# EAGLE board Maze_Project (EAGLE 8.7.0)
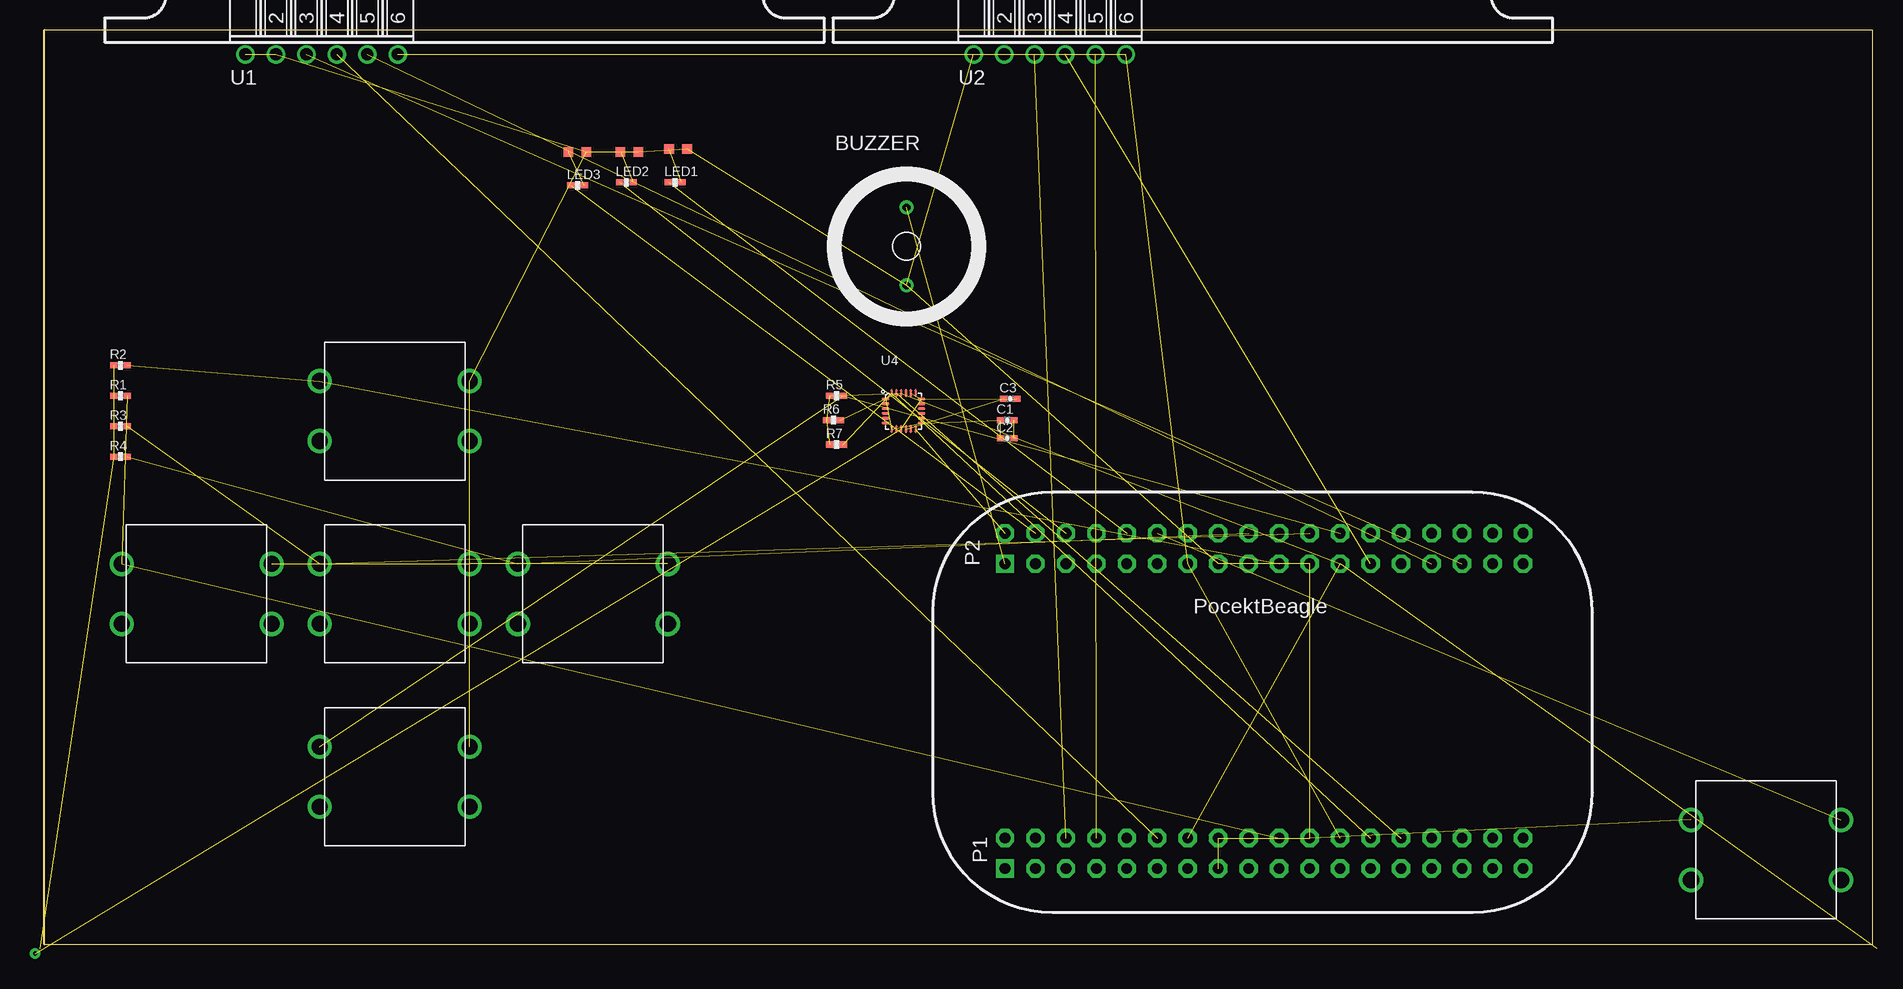
[diagram p0: board, top side]
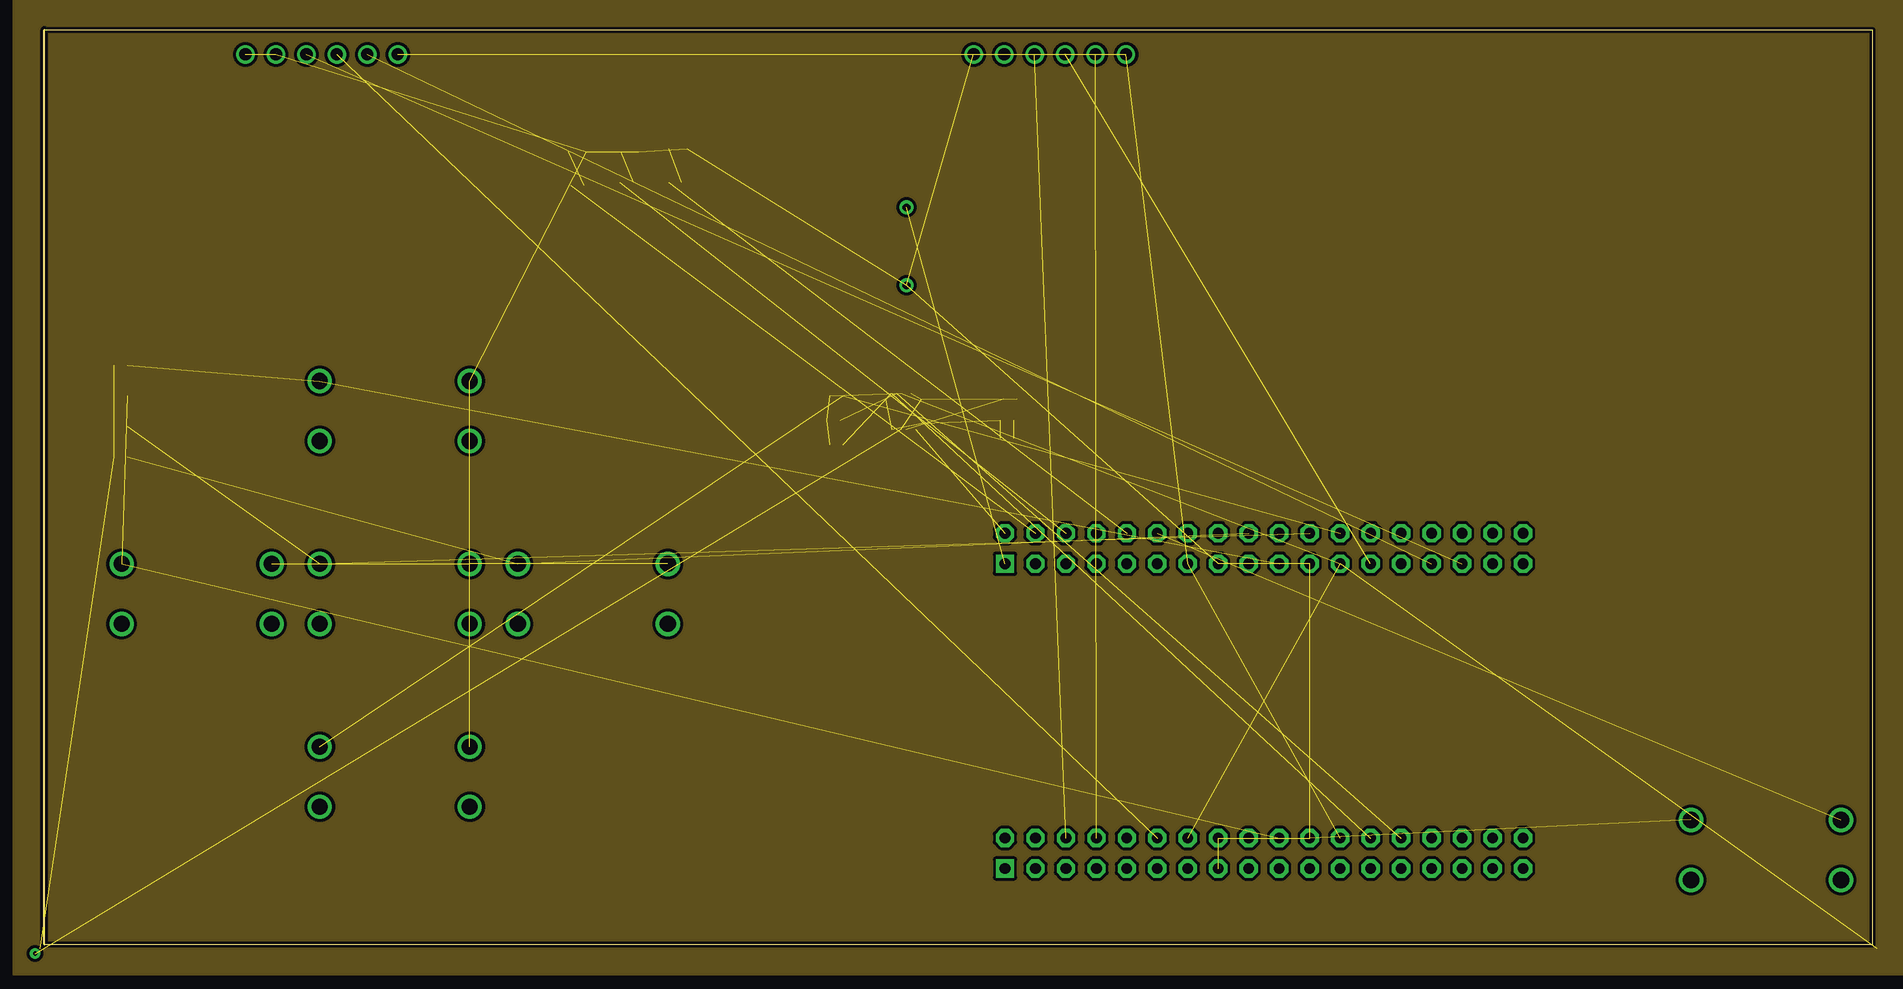
[diagram p1: board, inner layer Route2]
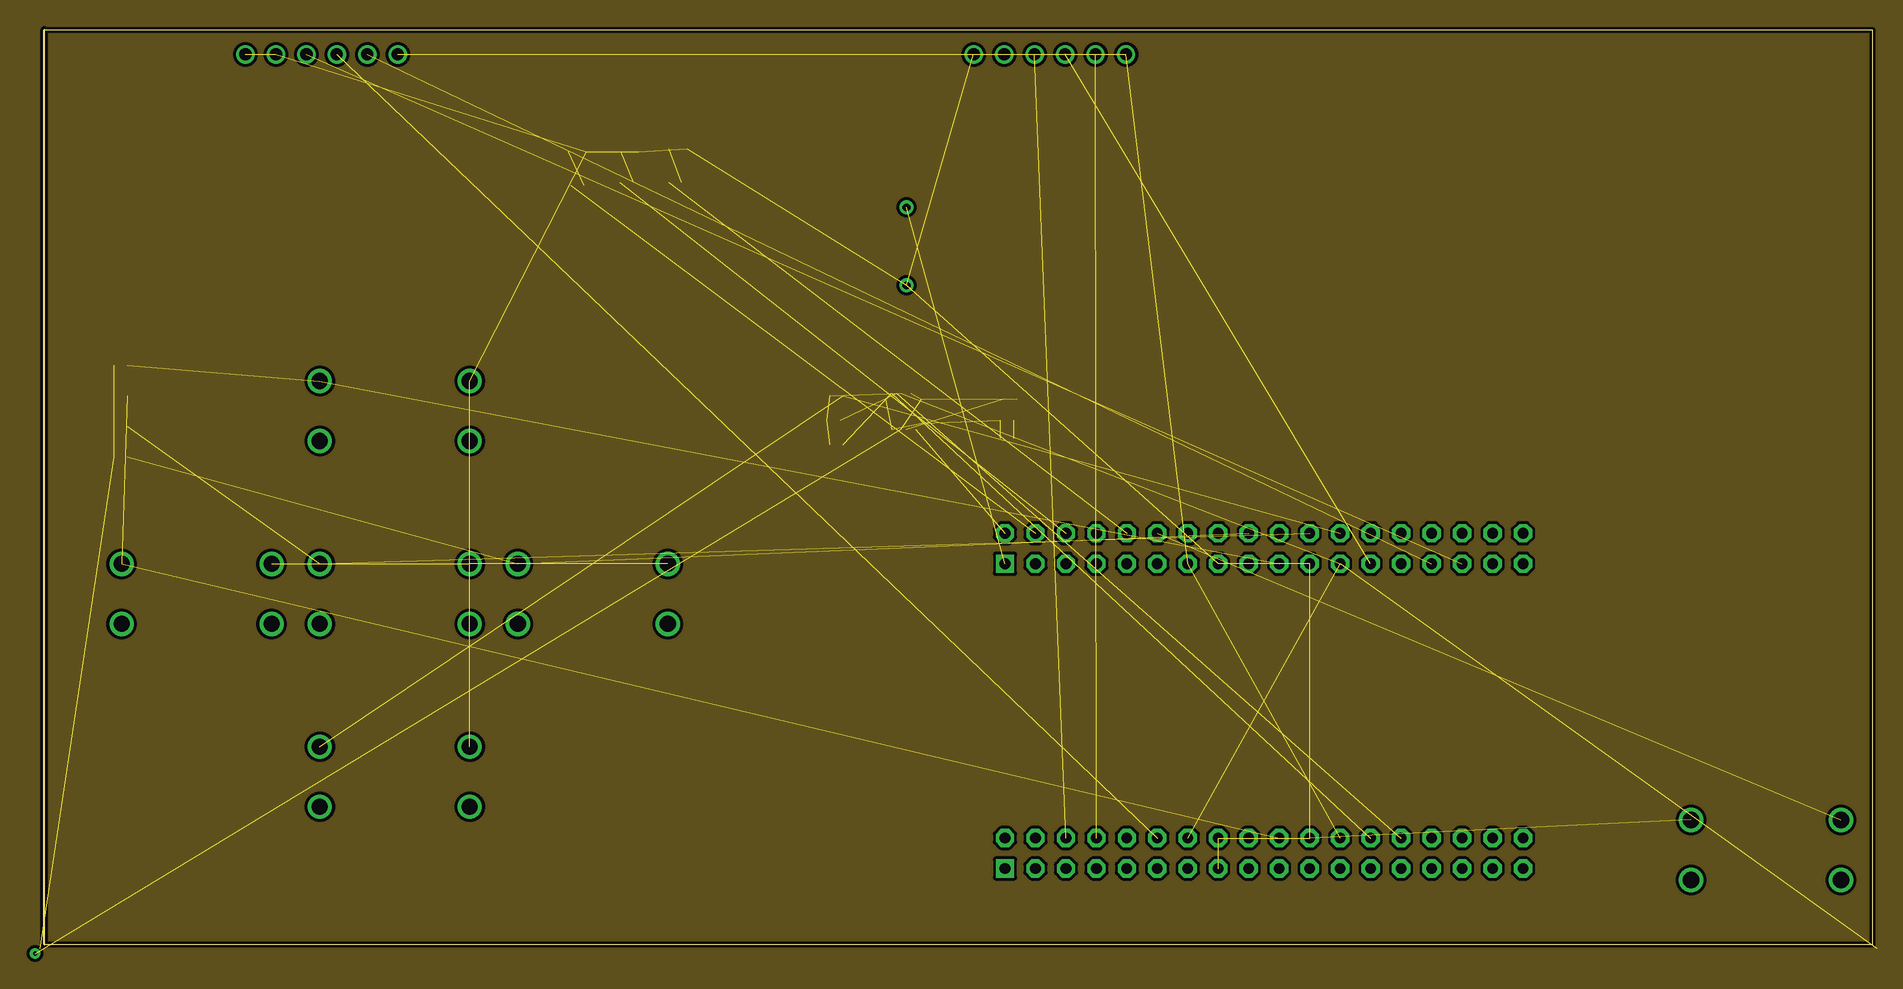
[diagram p2: board, inner layer Route15]

Size 152.4 x 76.2 mm. Coordinates in mm from the lower left corner, seen from the top.
Outline: 0,0 152.4,0 152.4,76.2 0,76.2 0,0
Copper layers (1*2*15*16): Top 0.035mm / dielectric 0.23mm / Route2 0.035mm / dielectric 0.93mm / Route15 0.035mm / dielectric 0.23mm / Bottom 0.035mm
Design rules "ENGI301_Maze_Project_4lyr (1)": minimum track width 10mil, minimum drill 12mil, track to track 10mil, track to pad 10mil, pad to pad 10mil, via to via 10mil, smd to smd 10mil, copper to edge 10mil, drill to drill 12mil, minimum pad ring 10mil, minimum via ring 10mil, stop-mask expansion 3mil, vias tented up to drill 25mil, thermal gap 10mil

## Footprints (pad centres in the part's own frame; a part is rotated, then mirrored left to right if it is on the bottom)
BUTTON = drill 1.35: P$1 -6.25,2.5; P$2 -6.25,-2.5; P$3 6.25,-2.5; P$4 6.25,2.5
BUZZER = drill 0.65: P$1 0,3.25; P$2 0,-3.25
C0402 = smd 0.61 x 0.508: 1 -0.559,0; 2 0.559,0
R0402 = smd 0.61 x 0.508: 1 -0.559,0; 2 0.559,0
FE06W = drill 1.016: 1 -6.35,0; 2 -3.81,0; 3 -1.27,0; 4 1.27,0; 5 3.81,0; 6 6.35,0
POCKETBEAGLE = drill 0.889 pad 1.524 square: 1 5.91,3.53; 37 5.91,28.93 | drill 0.889 pad 1.524 octagon: 2 5.91,6.07; 3 8.45,3.53; 4 8.45,6.07; 5 10.99,3.53; 6 10.99,6.07; 7 13.53,3.53; 8 13.53,6.07; 9 16.07,3.53; 10 16.07,6.07; 11 18.61,3.53; 12 18.61,6.07; 13 21.15,3.53; 14 21.15,6.07; 15 23.69,3.53; 16 23.69,6.07; 17 26.23,3.53; 18 26.23,6.07; 19 28.77,3.53; 20 28.77,6.07; 21 31.31,3.53; 22 31.31,6.07; 23 33.85,3.53; 24 33.85,6.07; 25 36.39,3.53; 26 36.39,6.07; 27 38.93,3.53; 28 38.93,6.07; 29 41.47,3.53; 30 41.47,6.07; 31 44.01,3.53; 32 44.01,6.07; 33 46.55,3.53; 34 46.55,6.07; 35 49.09,3.53; 36 49.09,6.07; 38 5.91,31.47; 39 8.45,28.93; 40 8.45,31.47; 41 10.99,28.93; 42 10.99,31.47; 43 13.53,28.93; 44 13.53,31.47; 45 16.07,28.93; 46 16.07,31.47; 47 18.61,28.93; 48 18.61,31.47; 49 21.15,28.93; 50 21.15,31.47; 51 23.69,28.93; 52 23.69,31.47; 53 26.23,28.93; 54 26.23,31.47; 55 28.77,28.93; 56 28.77,31.47; 57 31.31,28.93; 58 31.31,31.47; 59 33.85,28.93; 60 33.85,31.47; 61 36.39,28.93; 62 36.39,31.47; 63 38.93,28.93; 64 38.93,31.47; 65 41.47,28.93; 66 41.47,31.47; 67 44.01,28.93; 68 44.01,31.47; 69 46.55,28.93; 70 46.55,31.47; 71 49.09,28.93; 72 49.09,31.47
QFN-3MMX3MM = smd 0.6 x 0.2: 1 -1.5,1; 2 -1.5,0.6; 3 -1.5,0.2; 4 -1.5,-0.2; 5 -1.5,-0.6; 6 -1.5,-1; 13 1.5,-1; 14 1.5,-0.6; 15 1.5,-0.2; 16 1.5,0.2; 17 1.5,0.6; 18 1.5,1 | smd 0.2 x 0.6: 7 -0.6,-1.5; 8 -1,-1.5; 9 -0.2,-1.5; 10 0.2,-1.5; 11 0.6,-1.5; 12 1,-1.5; 19 1,1.5; 20 0.6,1.5; 21 0.2,1.5; 22 -0.2,1.5; 23 -0.6,1.5; 24 -1,1.5
LED = smd 0.8 x 0.8: P$1 -0.75,0; P$2 0.75,0

## Placement (x,y rotation side)
BUTTON1  [BUTTON]  12.7,29.21 0 top
BUTTON2  [BUTTON]  29.21,44.45 0 top
BUTTON3  [BUTTON]  29.21,29.21 0 top
BUTTON4  [BUTTON]  45.72,29.21 0 top
BUTTON5  [BUTTON]  29.21,13.97 0 top
BUZZER  0.1uF  [BUZZER]  71.88,58.17 0 top
C1  0.1uF  [C0402]  80.26,43.69 0 top
C2  10nF  [C0402]  80.26,42.16 0 top
C3  0.1uF  [C0402]  80.52,45.47 0 top
LED1  2.2K  [R0402]  52.58,63.5 0 top
LED2  2.2K  [R0402]  48.51,63.5 0 top
LED3  2.2K  [R0402]  44.45,63.25 0 top
PWR_BUTTON  [BUTTON]  143.51,7.87 0 top
R1  2.2K  [R0402]  6.35,45.72 0 top
R2  2.2K  [R0402]  6.35,48.26 0 top
R3  2.2K  [R0402]  6.35,43.18 0 top
R4  2.2K  [R0402]  6.35,40.64 0 top
R5  2.2K  [R0402]  66.04,45.72 0 top
R6  [R0402]  65.79,43.69 0 top
R7  [R0402]  66.04,41.66 0 top
U1  MOD-LED8X8RGB-CONN  [FE06W]  23.11,74.17 0 top
U2  MOD-LED8X8RGB-CONN  [FE06W]  83.82,74.17 0 top
U3  POCKETBEAGLE  [POCKETBEAGLE]  74.17,2.79 0 top
U4  [QFN-3MMX3MM]  71.63,44.45 0 top
U$1  [MOD-LED8X8RGB]  65.02,75.18 90 top
U$2  [MOD-LED8X8RGB]  125.73,75.18 90 top
U$3  [MOD-LED8X8RGB]  125.73,133.86 90 top  (outside the outline)
U$4  [MOD-LED8X8RGB]  65.53,133.86 90 top  (outside the outline)
U$7  LED  [LED]  52.83,66.29 0 top
U$8  LED  [LED]  48.77,66.04 0 top
U$9  LED  [LED]  44.45,66.04 0 top

## Library data of the parts
BUTTON1-BUTTON5 BUZZER PWR_BUTTON U$7-U$9 = ENGI_301_Maze
C1-C3 U4 = ENGI301_PCB_design_project
LED1-LED3 R1-R7 = ENGI301_design_example
U1 U2 U$1-U$4 = ENGI301_Maze_Project_Parts (1)
U3 = ENGI301_Maze_Project_Parts

## Nets
AGRAWAL: C3.2 U4.9 U4.18 U4.20
BUTTON1: BUTTON1.P$1 R1.2 U3.20
BUTTON2: BUTTON2.P$1 R2.2 U3.55
BUTTON3: BUTTON3.P$1 R3.2 U3.58
BUTTON4: BUTTON4.P$1 R4.2 U3.54
BUTTON5: BUTTON5.P$1 R5.2 U3.60
BUZZER: BUZZER.P$1 U3.37
GND: BUTTON1.P$4 BUTTON2.P$4 BUTTON3.P$4 BUTTON4.P$4 BUTTON5.P$4 BUZZER.P$2 PWR_BUTTON.P$1 U1.1 U1.2 U2.1 U2.2 U3.15 U3.16 U3.22 U3.51 U3.57 U$7.P$2 U$8.P$2 U$9.P$2
I2C2.SCL: R6.2 U3.28 U4.23
I2C2.SDA: R7.2 U3.26 U4.24
IMU_INT: U3.38 U4.12
LED1: LED1.1 U3.46
LED2: LED2.1 U3.42
LED3: LED3.1 U3.40
LED_ARR_CLK_1: U1.5 U3.65
LED_ARR_CLK_2: U2.5 U3.8
LED_ARR_CS_1: U1.3 U3.67
LED_ARR_CS_2: U2.3 U3.6
LED_ARR_MOSI_1: U1.4 U3.12
LED_ARR_MOSI_2: U2.4 U3.61
N$1: C1.2 C2.2
N$2: C3.1 U4.10
N$5: LED1.2 U$7.P$1
N$6: LED2.2 U$8.P$1
N$7: LED3.2 U$9.P$1
PWR_BUTTON: PWR_BUTTON.P$4 U3.48
S$1: R1.1 R2.1 R3.1 R4.1
SERENA: R5.1 R6.1 R7.1 U3.14 U3.59 U4.22
SYS_VDD1_3P3V: C1.1 C2.1 U4.1 U4.8 U4.13
VDD_5V: U1.6 U2.6 U3.24 U3.49

## Tracks (layer width: path | path; a pad name or v marks a point on that pad's centre or on a via)
AGRAWAL  (via drill 0.35)  (4 unrouted)
  other vias: -0.76,-0.76
BUTTON1  (2 unrouted)
BUTTON2  (2 unrouted)
BUTTON3  (2 unrouted)
BUTTON4  (2 unrouted)
BUTTON5  (2 unrouted)
BUZZER  (1 unrouted)
GND  (18 unrouted)
I2C2.SCL  (2 unrouted)
I2C2.SDA  (2 unrouted)
IMU_INT  (1 unrouted)
LED1  (1 unrouted)
LED2  (1 unrouted)
LED3  (1 unrouted)
LED_ARR_CLK_1  (1 unrouted)
LED_ARR_CLK_2  (1 unrouted)
LED_ARR_CS_1  (1 unrouted)
LED_ARR_CS_2  (1 unrouted)
LED_ARR_MOSI_1  (1 unrouted)
LED_ARR_MOSI_2  (1 unrouted)
N$1  (1 unrouted)
N$2  (1 unrouted)
N$5  (1 unrouted)
N$6  (1 unrouted)
N$7  (1 unrouted)
PWR_BUTTON  (1 unrouted)
S$1  (4 unrouted)
S$2
  pour Route2: -2.54,-2.54 -2.54,78.74 154.94,78.74 154.94,-2.54
S$3
  pour Route15: -5.08,-3.81 -5.08,81.28 157.48,81.28 157.48,-5.08 -5.08,-5.08
SERENA  (6 unrouted)
SYS_VDD1_3P3V  (4 unrouted)
VDD_5V  (3 unrouted)